# Altium PCB Linear_patch.PcbDoc
Units mm, origin at the board's own origin, x right, y up, seen from the top; angles counter-clockwise.
Board outline 100 x 100 mm, 2 copper layers (Top Layer, Bottom Layer); 1 components, 2 nets, 5 pads, 0 vias.
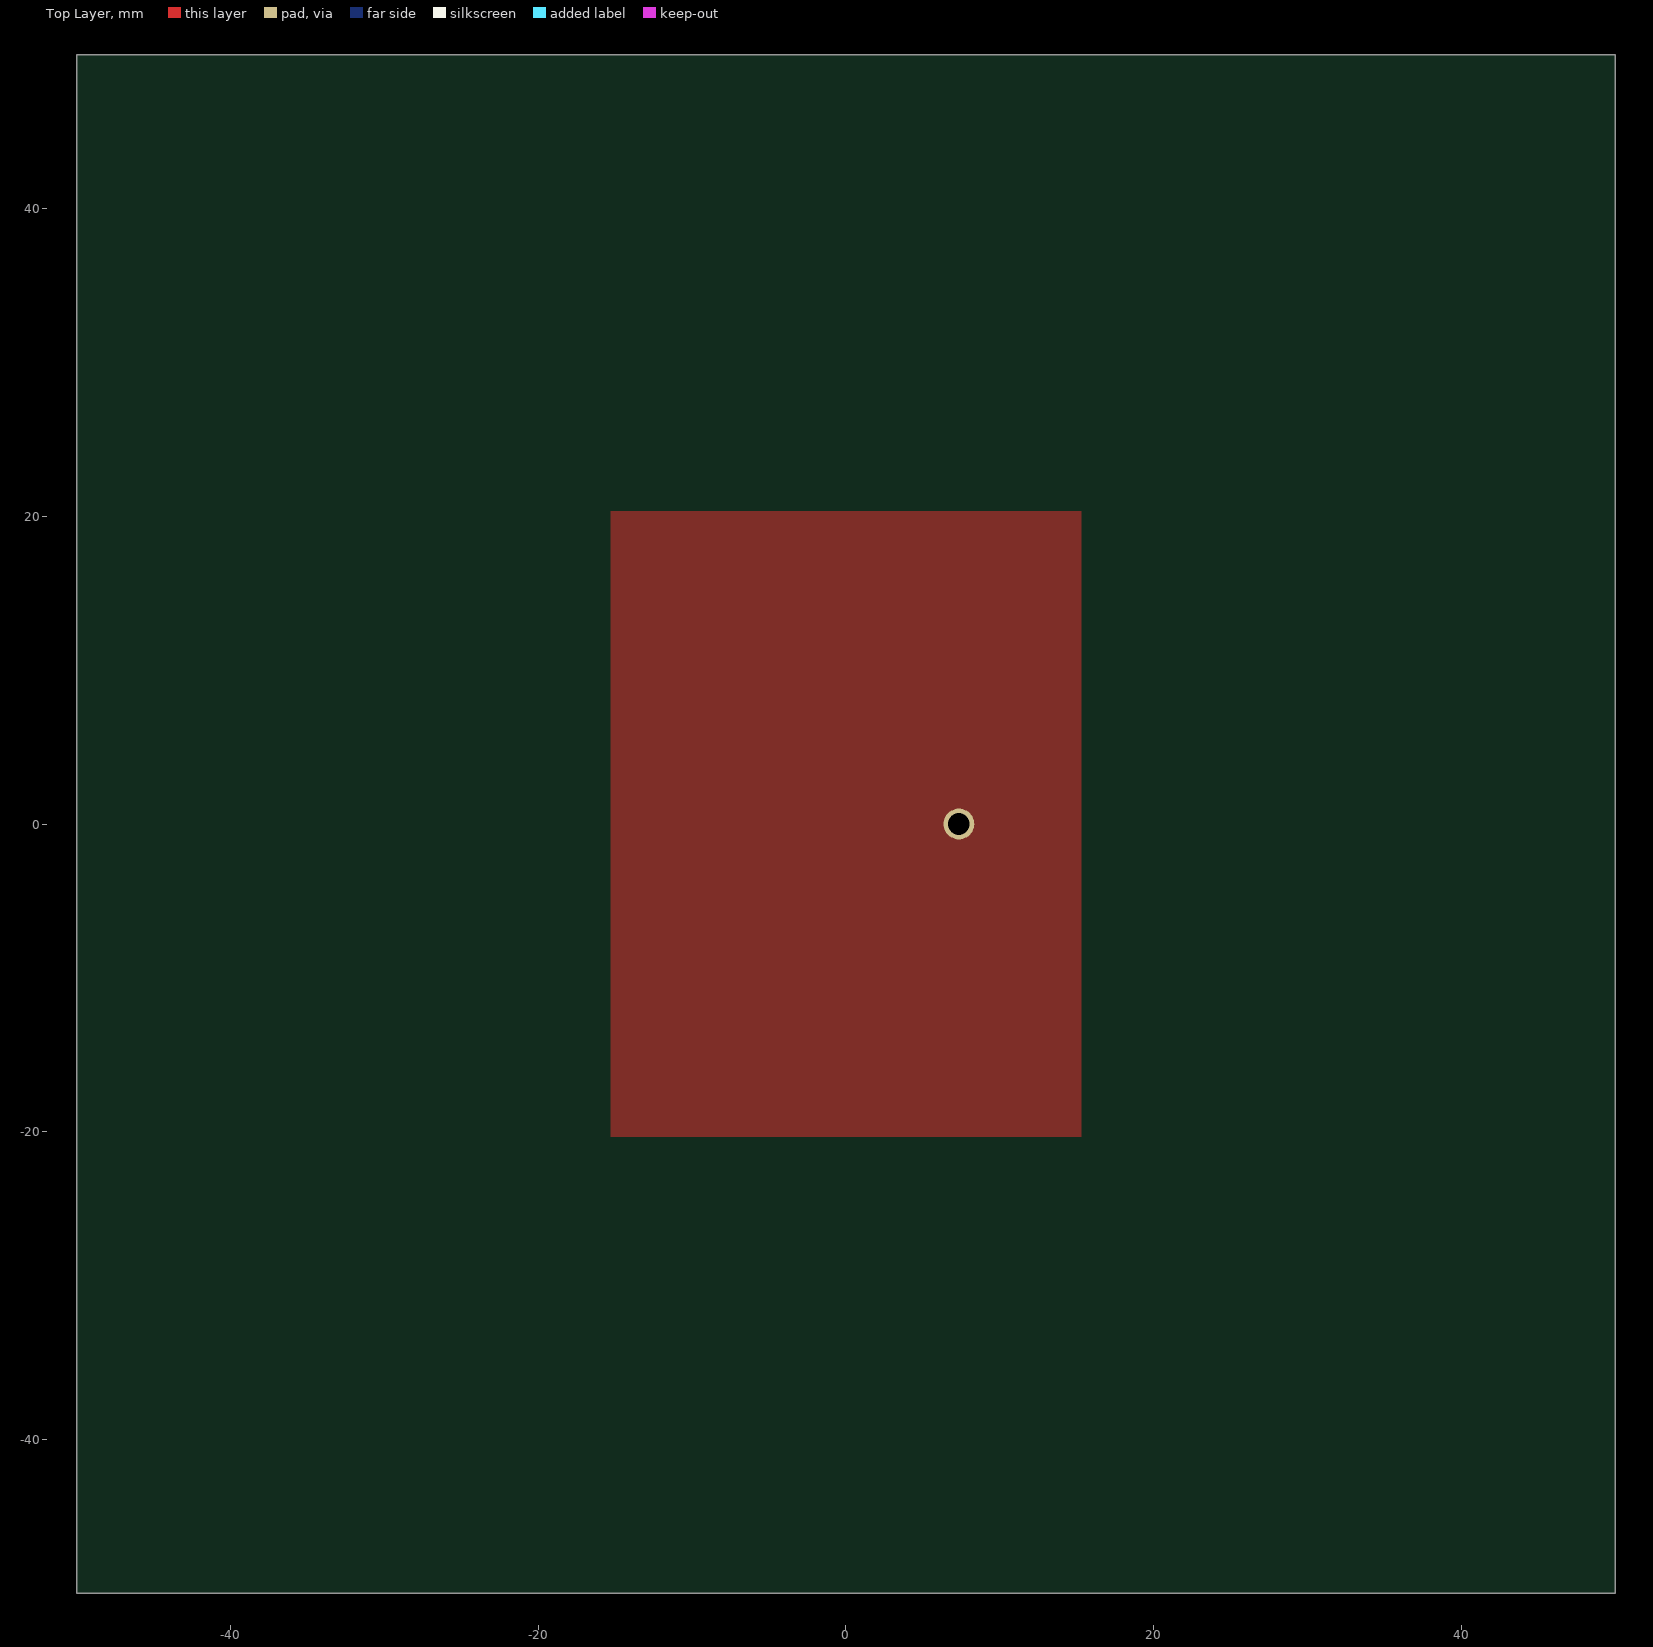
[diagram p0: Top Layer view]
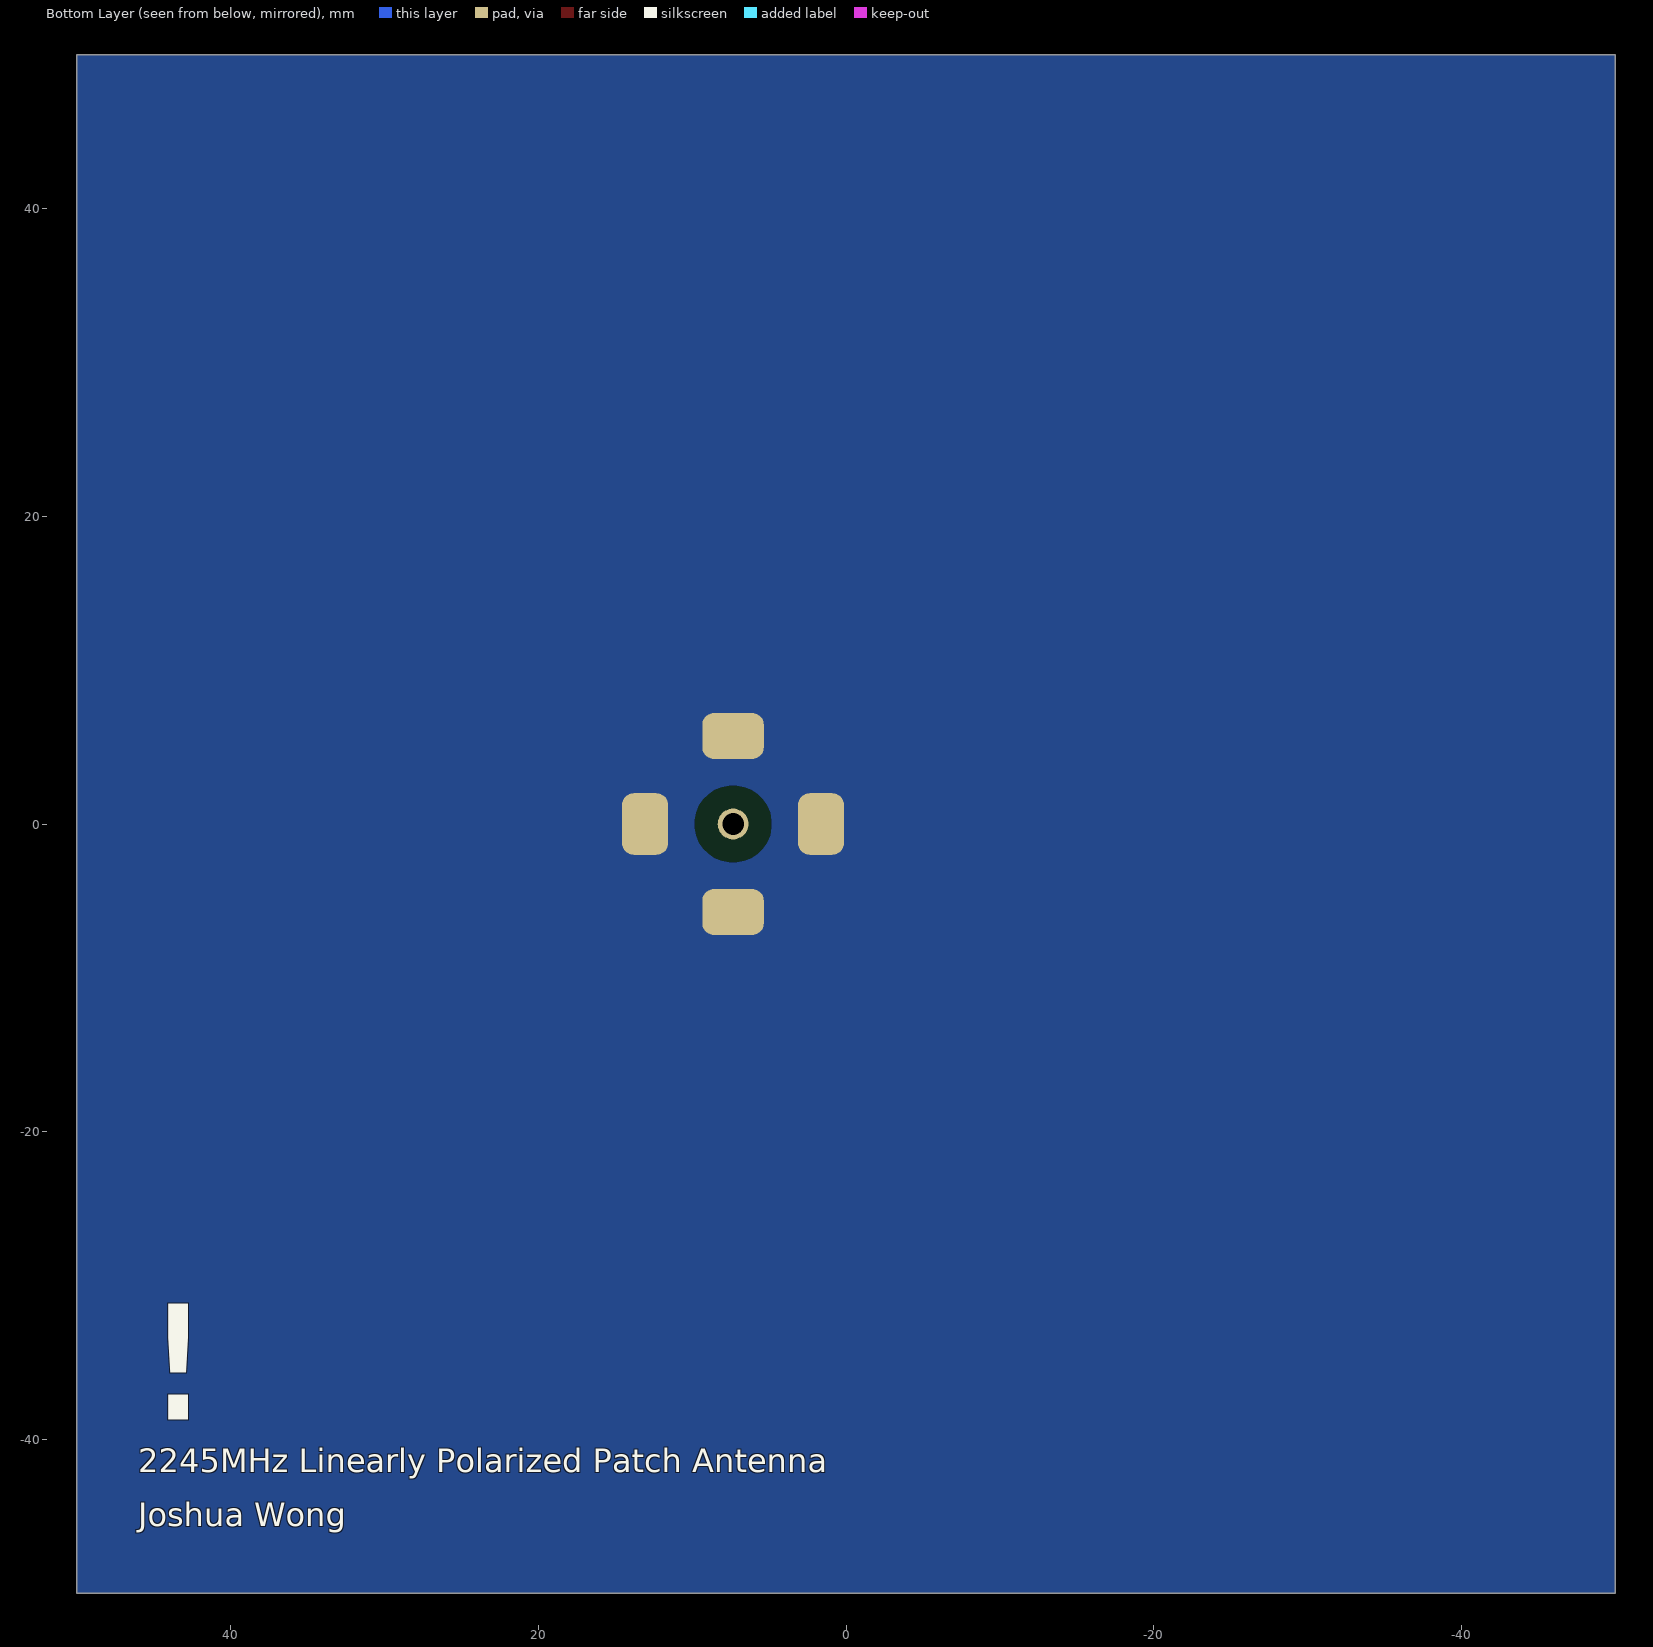
[diagram p1: Bottom Layer view, seen from below]

## Layer stack, top to bottom
Top Solder: solder mask 0.0102, Solder Resist, Dk 3.5
Top Layer: signal copper 0.0356
Dielectric 1: dielectric 0.32, FR-4, Dk 4.8
Bottom Layer: signal copper 0.0356
Bottom Solder: solder mask 0.0102, Solder Resist, Dk 3.5

## Board outline
-50,-50 -50,50 50,50 50,-50

## Design rules (kind name [scope] priority, off if disabled: settings)
Clearance [All] p1: gap=0.254 ignorepadtopadclearanceinfootprint=FALSE
PolygonConnect [All] p1: connectstyle=Direct reliefconductorwidth=0.254 reliefentries=4 polygonreliefangle="90 Angle" airgapwidth=0.254
RoutingVias [All] p1: holewidth=0.711 width=1.27 viastyle="Through Hole" minholewidth=0.711 minwidth=1.27 maxholewidth=0.711 maxwidth=1.27
SolderMaskExpansion [All] p1: expansion=0 istentingtop=FALSE
SupplyNets "Schematic Supply Nets" [InNet('GND')] p1: voltage=0.000
Width [All] p1: maxlimit=0.254 minlimit=0.254 preferedwidth=0.254
30 further rules are at their usual default settings.

## Components (designator, comment, footprint, x,y, rotation, side; value= is the part's Value field where it differs from the comment)
J1 "132150" 132150-Footprint-1 7.344,0 r180 bottom

## Footprints (in the part's own frame and the unit in brackets; to place one, negate y for a bottom-side part, rotate by r counter-clockwise, add the part's x,y. Pads: shape width x height; smd on the part's side, far side on the other; paste and mask are expansions set on the pad)
132150-Footprint-1 [mm]
  rrect50% 4x3 smd: 2(0,5.72) 4(0,-5.72)
  round 2 hole 1.4: 3(0,0)
  rrect50% 3x4 smd: 3(5.72,0) 5(-5.72,0)

## Part data
J1: library part CMP-002-00083-2, "CONN SMA RCPT STR 50 OHM SOLDER", Case/Package=SMA, Max Operating Temperature=165°C, Min Operating Temperature=-65°C, Connector Type="Coaxial, Receptacle, SMA, Socket", Gender=Female, Mounting Technology="Bulkhead, Flanges, Panel"

## Nets (pads, with @x,y where several pads share a name; then routed paths per layer and width w, separated by ;. In a path a pad name is that pad's centre, name@x,y a point inside that pad or via, vN(x,y) a via of type N, cw(c..) or ccw(c..) an arc to the next point about the centre after c; other vN are vias at no path point)
GND: J1.2 J1.3@1.624,0 J1.4 J1.5
SIGNAL: J1.3@7.344,0

## Polygon pours and split planes (outlines as drawn)
GND on Bottom Layer "GND_L02_P001" (solid, pour order 1): -50,-50 -50,50 50,50 50,-50 -50,-50
no net on Top Solder "SIGNAL_L01_P000" (solid, pour order 0): -50,-50 50,-50 50,50 -50,50
SIGNAL on Top Layer "SIGNAL_L01_P002" (solid, pour order 2): -15.3,-20.33 15.3,-20.33 15.3,20.33 -15.3,20.33 -15.3,-20.33

## Other copper
Bottom Layer:
  pour cut-out: 4.844,0 ccw(c7.344,0) 7.344,-2.5 ccw(c7.344,0) 9.844,0 ccw(c7.344,0) 7.344,2.5 ccw(c7.344,0)

## Silkscreen, mask and mechanical layers (free items; w line width, h text height)
Bottom Overlay:
  text "!" at 46.021,-42.138 h18
  text "2245MHz Linearly Polarized Patch Antenna" at 46.021,-42.138 h1.52
  text "Joshua Wong" at 46.021,-45.638 h1.52
Mechanical 1:
  the board outline again, w0.254